# Altium PCB Multivibrator.PcbDoc
Units mm, origin at the board's own origin, x right, y up, seen from the top; angles counter-clockwise.
Board outline 30 x 30 mm, 2 copper layers (Top Layer, Bottom Layer), stack 1.569 mm thick; 9 components, 6 nets, 20 pads, 0 vias.
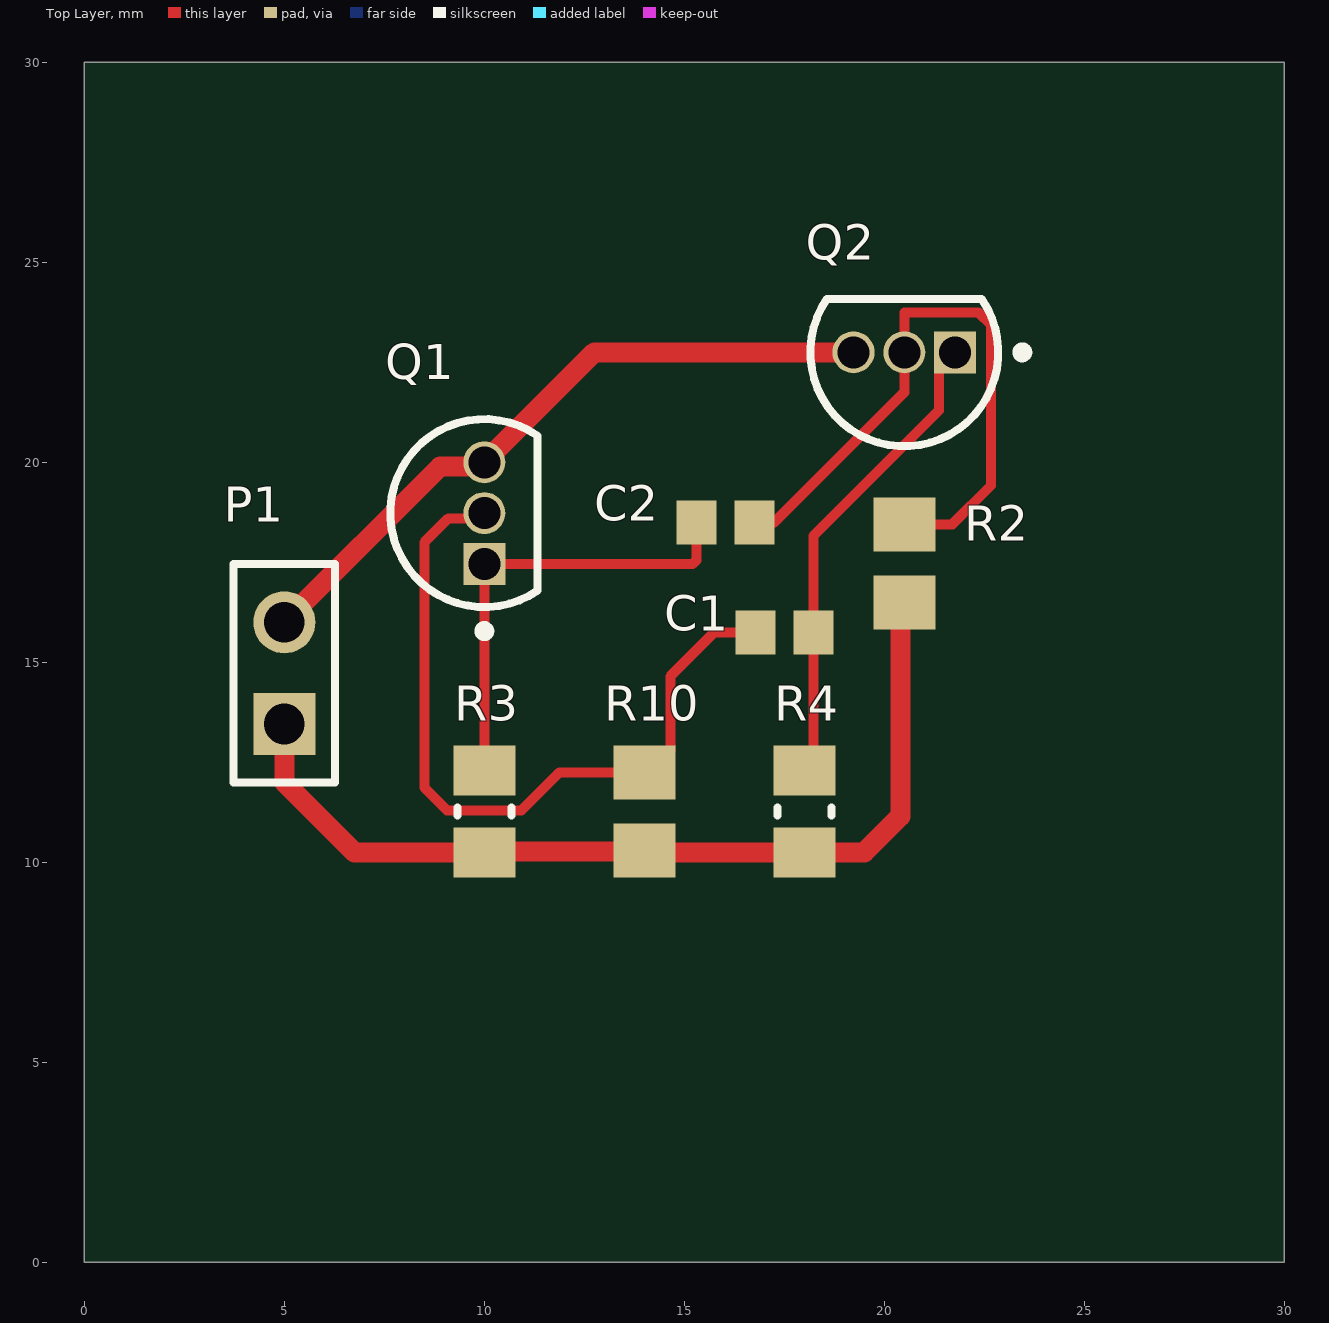
[diagram p0: Top Layer view]
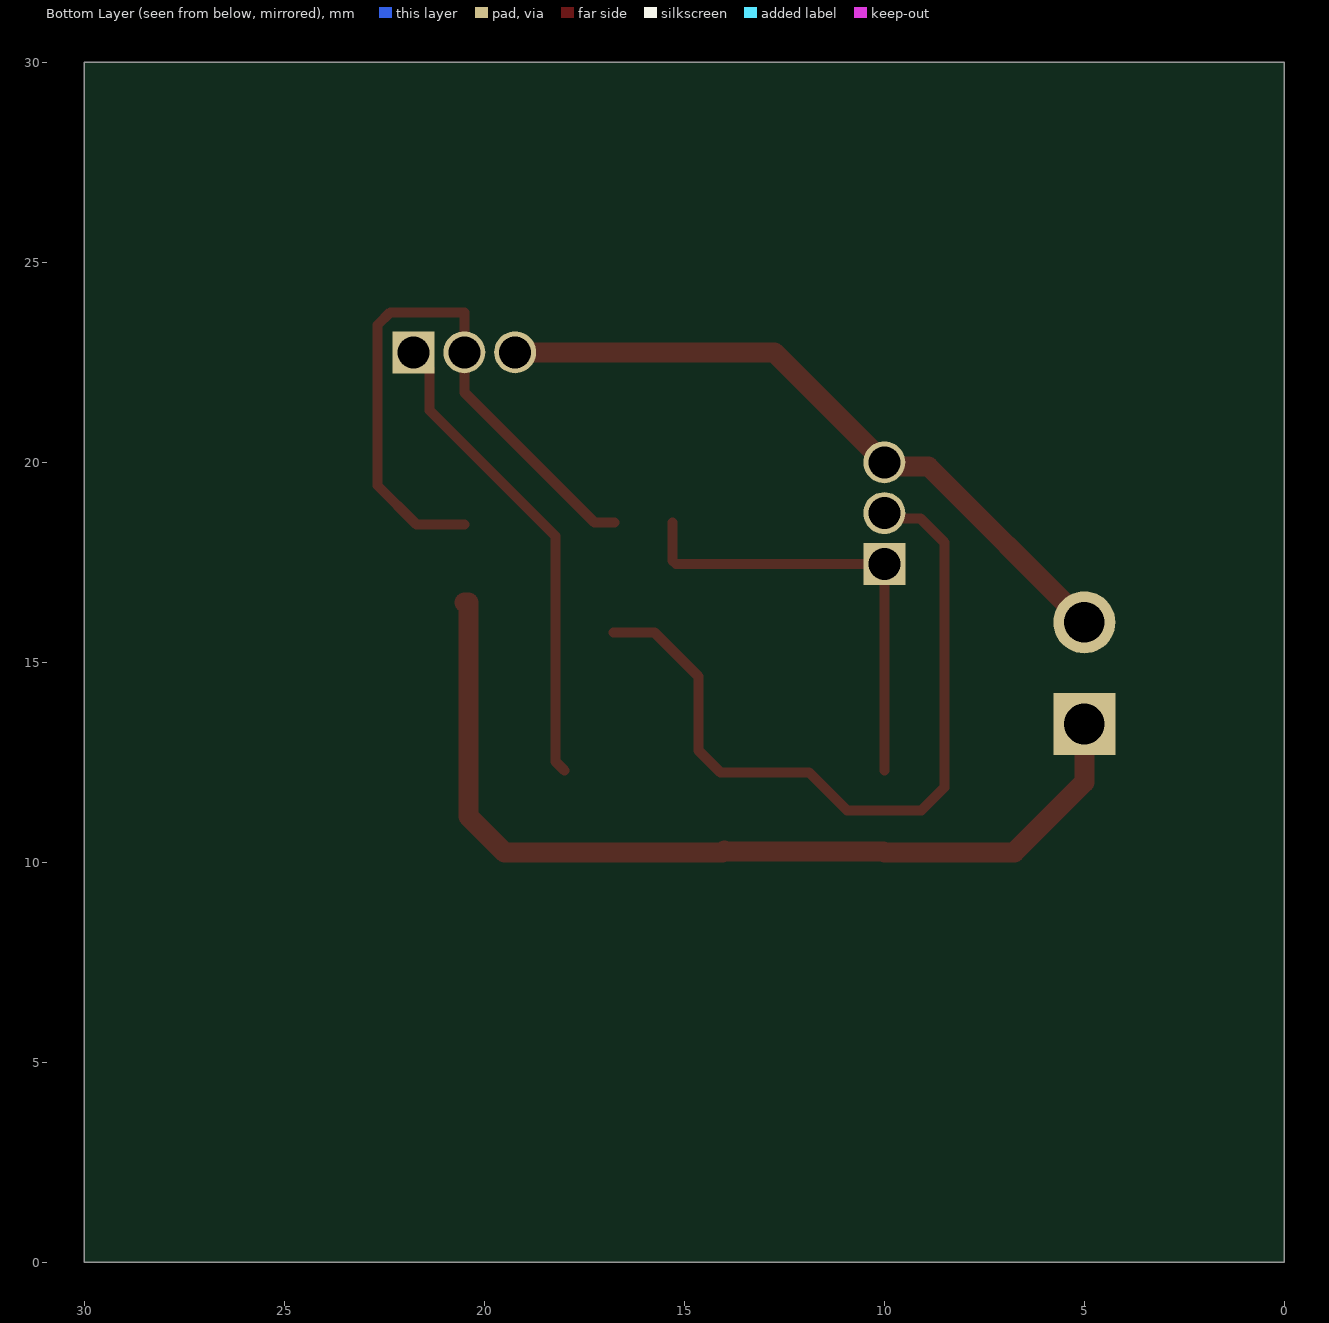
[diagram p1: Bottom Layer view, seen from below]

## Layer stack, top to bottom
Top Solder: solder mask 0.0254, SM-001, Dk 4
Top Layer: signal copper 0.035
Dielectric 1: core 1.4986, Core-043, Dk 4.3
Bottom Layer: signal copper 0.035
Bottom Solder: solder mask 0.0254, SM-001, Dk 4

## Board outline
0,0 30,0 30,30 0,30

## Design rules (kind name [scope] priority, off if disabled: settings)
AssemblyTestPointUsage [All] p1 off:
AssemblyTestpoint [All] p1 off: testpointundercomponent=TRUE minsize=1.016 maxsize=2.54 preferedsize=1.524 minholesize=0 maxholesize=1.016 preferedholesize=0.813 testpointgrid=0.025 usegrid=TRUE gridtolerance=0 allowsidetop=TRUE allowsidebottom=TRUE
Clearance [All] p1: gap=0.25 ignorepadtopadclearanceinfootprint=FALSE except(0.22: THPad-THPad)
FabricationTestPointUsage [All] p1 off: valid=0 allowmultiple=FALSE
FabricationTestpoint [All] p1 off: side=3 testpointundercomponent=TRUE minsize=1.016 maxsize=2.54 preferedsize=1.524 minholesize=0 maxholesize=1.016 preferedholesize=0.813 testpointgrid=0.025 allowsidetop=TRUE allowsidebottom=TRUE usegrid=TRUE gridtolerance=0
MinimumSolderMaskSliver [All] p1: minsoldermaskwidth=0.22
PolygonConnect [All] p1: connectstyle=Relief reliefconductorwidth=0.254 reliefentries=4 polygonreliefangle="90 Angle" airgapwidth=0.254
RoutingVias [All] p1: holewidth=0.6 width=1 viastyle="Through Hole" minholewidth=0.6 minwidth=1 maxholewidth=0.6 maxwidth=1
SilkToSolderMaskClearance [IsPad] p1: minsilkscreentomaskgap=0.175 clearancetoexposedcopper=TRUE
SolderMaskExpansion SolderMaskExpansion_Transistor [HasFootprint('ONSC-TO-92-3-29-11')] p1: expansion=0
SolderMaskExpansion [All] p2: expansion=0.102
Width Width_Power [(InNet('12V') OR InNet('GND'))] p1: maxlimit=0.5 minlimit=0.25 preferedwidth=0.5
Width [All] p2: maxlimit=0.25 minlimit=0.2 preferedwidth=0.25
24 further rules are at their usual default settings.

## Components (designator, comment, footprint, x,y, rotation, side; value= is the part's Value field where it differs from the comment)
C1 "C0603C223K4RACTU" CAPC1608X87X35ML15T15 17.5,15.75 r0 top
C2 "C0603C223K4RACTU" CAPC1608X87X35ML15T15 16.025,18.5 r0 top
P1 "TSW-102-26-G-S" SMTC-TSW-102-26-XX-S 5,13.46 r90 top
Q1 "BC547CG" ONSC-TO-92-3-29-11 10,18.73 r90 top
Q2 "BC547CG" ONSC-TO-92-3-29-11 20.5,22.75 r180 top
R2 "ERJ-6GEYJ104V" RESC2013X70X40ML20T20 20.5,17.475 r270 top
R3 "CRCW08051K00JNEA" RESC2013X50X30ML20T20 10,11.275 r270 top
R4 "CRCW08051K00JNEA" RESC2013X50X30ML20T20 18,11.275 r270 top
R10 "ERJ-6GEYJ104V" RESC2013X70X40ML20T20 14,11.275 r270 top (schematic designator R1)

## Footprints (in the part's own frame and the unit in brackets; to place one, negate y for a bottom-side part, rotate by r counter-clockwise, add the part's x,y. Pads: shape width x height; smd on the part's side, far side on the other; paste and mask are expansions set on the pad)
CAPC1608X87X35ML15T15 [mm] "Chip Capacitor, 2-Leads, Body 1.60x0.80mm, IPC Low Density"
  rect 1x1.1 smd: 1(-0.725,0) 2(0.725,0)
  body extent -0.87,-0.48 0.87,0.47, height 0.87
ONSC-TO-92-3-29-11 [mm] "TO, 3-Leads, Body Dia 4.7mm, Pitch 1.27mm"
  rect 1.05x1.05 hole 0.8: 1(-1.27,0)
  round 1.05 hole 0.8: 2(0,0) 3(1.27,0)
  silkscreen extent -3.07,-1.34 2.35,2.35, body extent -2.35,-1.33 2.36,2.36, height 7.87
RESC2013X50X30ML20T20 [mm] "Chip Resistor, 2-Leads, Body 2.00x1.25mm, IPC Low Density"
  rect 1.25x1.55 smd: 1(-1.025,0) 2(1.025,0)
  silkscreen extent -0.1,-0.67 0.1,0.67, body extent -1.1,-0.72 1.1,0.72, height 0.5
RESC2013X70X40ML20T20 [mm] "Chip Resistor, 2-Leads, Body 2.00x1.25mm, IPC Low Density"
  rect 1.35x1.55 smd: 1(-0.975,0) 2(0.975,0)
  body extent -1.1,-0.72 1.1,0.72, height 0.7
SMTC-TSW-102-26-XX-S [mm] ".025 SQ Post Terminal Strip Assembly, 1x2 Pins, Vertical, 2.54mm Pitch, Male"
  rect 1.55x1.55 hole 1.02: 1(0,0)
  round 1.55 hole 1.02: 2(2.54,0)
  silkscreen extent -1.46,-1.27 4,1.27, body extent -1.4,-1.27 3.81,1.27, height 8.38

## Part data
C1 C2: library part CMP-2006-03139-1, Capacitance=22nF, Manufacturer=Kemet, Part Number=C0603C223K4RACTU
P1: library part CMP-1024-00327-1, "0.025\" SQ Post Header, Through-hole, Vertical, -55 to 125 degC, 2.54 mm Pitch, 2-Pin, Male, RoHS", Manufacturer=Samtec, Temperature Range="-55 to 125 degC", ComponentLink1Description="Manufacturer URL", ComponentLink1URL=http://www.samtec.com, ComponentLink2Description=Datasheet, ComponentLink2URL=http://www.samtec.com/documents/webfiles/pdf/TSW_TH.PDF, ComponentLink3Description="Package Specification", ComponentLink3URL=http://www.samtec.com/documents/webfiles/cpdf/TSW-XXX-XX-XXX-X-XX-XXX-MKT.pdf, DatasheetVersion=F-214, Mounting Technology=Through-hole, Orientation=Vertical, PackageDescription=".025[0.64] SQ. Post Terminal Strip Assembly", PackageReference=TSW-102-26-XX-S, PackageVersion="DM, 8/1988", PartNumber=TSW-102-26-G-S, Pitch="2.54 mm", RoHS=True
Q1 Q2: library part CMP-1048-01464-1, "Amplifier Transistor, NPN Silicon, 3-Pin TO-92, Pb-Free, Bulk Box", Manufacturer="On Semiconductor", ComponentLink1Description="Manufacturer URL", ComponentLink1URL=http://www.onsemi.com/, ComponentLink2Description=Datasheet, ComponentLink2URL=http://www.onsemi.com/pub_link/Collateral/BC546-D.PDF, ComponentLink3Description="Package Specification", ComponentLink3URL=http://www.onsemi.cn/pub_link/Collateral/2N6426-D.PDF, DatasheetVersion="Rev. 7", fT Min (MHz)=150, IC Continuous (A)=0.1, Mounting Technology="Through Hole", PackageDescription="3-Pin Transistor Outline, Body 4.825 x 3.685 mm, Pitch 1.27 mm", PackageReference=TO-92-3-29-11_AM_SL, PackageVersion="Rev. AM", Packing="Bulk Box", PartNumber=BC547CG, Polarity=NPN, RoHS=TRUE
R2 R10: library part CMP-2001-00338-1, Case/Package=0805, Manufacturer=Panasonic, Resistance=100kR, Tolerance=5%, Part Number=ERJ-6GEYJ104V
R3 R4: library part CMP-2001-03597-1, Case/Package=0805, Manufacturer="Vishay Dale", Resistance=1kR, Tolerance=5%, Part Number=CRCW08051K00JNEA

## Nets (pads, with @x,y where several pads share a name; then routed paths per layer and width w, separated by ;. In a path a pad name is that pad's centre, name@x,y a point inside that pad or via, vN(x,y) a via of type N, cw(c..) or ccw(c..) an arc to the next point about the centre after c; other vN are vias at no path point)
12V: P1.1 R2.2 R3.2 R4.2 R10.2 | length 23.4
  Top Layer w0.5: P1.1 5,12 6.75,10.25 R3.2 10.025,10.275 13.975,10.275 R10.2 14.05,10.25 R4.2 19.5,10.25 20.4,11.15 20.4,16.5 R2.2
GND: P1.2 Q1.3 Q2.3 | length 17
  Top Layer w0.5: P1.2 8.895,19.895 9.895,19.895 Q1.3 12.75,22.75 Q2.3
NetC1_1: C1.1 Q1.2 R10.1 | length 19.4
  Top Layer w0.25: Q1.2 9.87,18.6 9.1,18.6 8.5,18 8.5,11.87 9.07,11.3 10.93,11.3 11.88,12.25 R10.1 14.1,12.25 14.65,12.8 14.65,14.65 15.75,15.75 C1.1
NetC1_2: C1.2 Q2.1 R4.1 | length 12
  Top Layer w0.25: R4.1 18.225,12.525 C1.2 18.225,18.155 21.37,21.3 21.37,22.35 Q2.1
NetC2_1: C2.1 Q1.1 R3.1 | length 11.4
  Top Layer w0.25: R3.1 Q1.1 15.21,17.46 15.3,17.55 C2.1
NetC2_2: C2.2 Q2.2 R2.1 | length 16
  Top Layer w0.25: C2.2 17.25,18.5 20.5,21.75 Q2.2 20.5,23.75 22.35,23.75 22.67,23.43 22.67,19.42 21.7,18.45 R2.1